# EAGLE board DAC_I2C_pan (EAGLE 7.1.0)
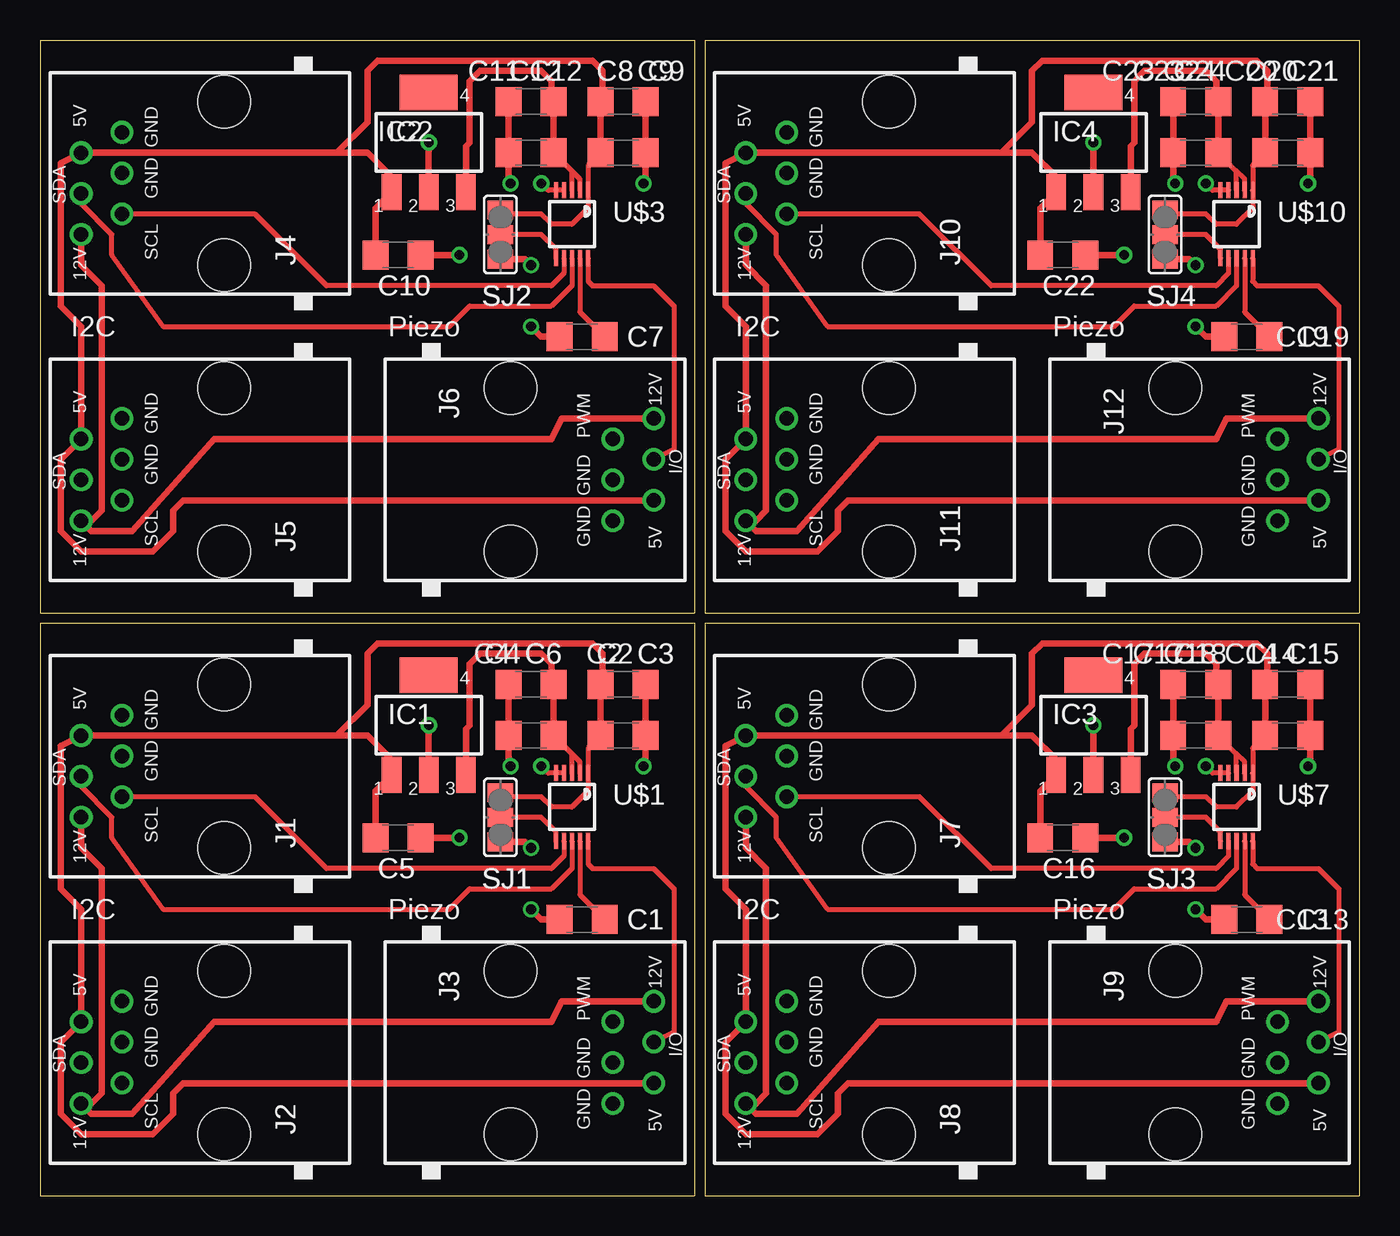
[diagram p0: board, top side]
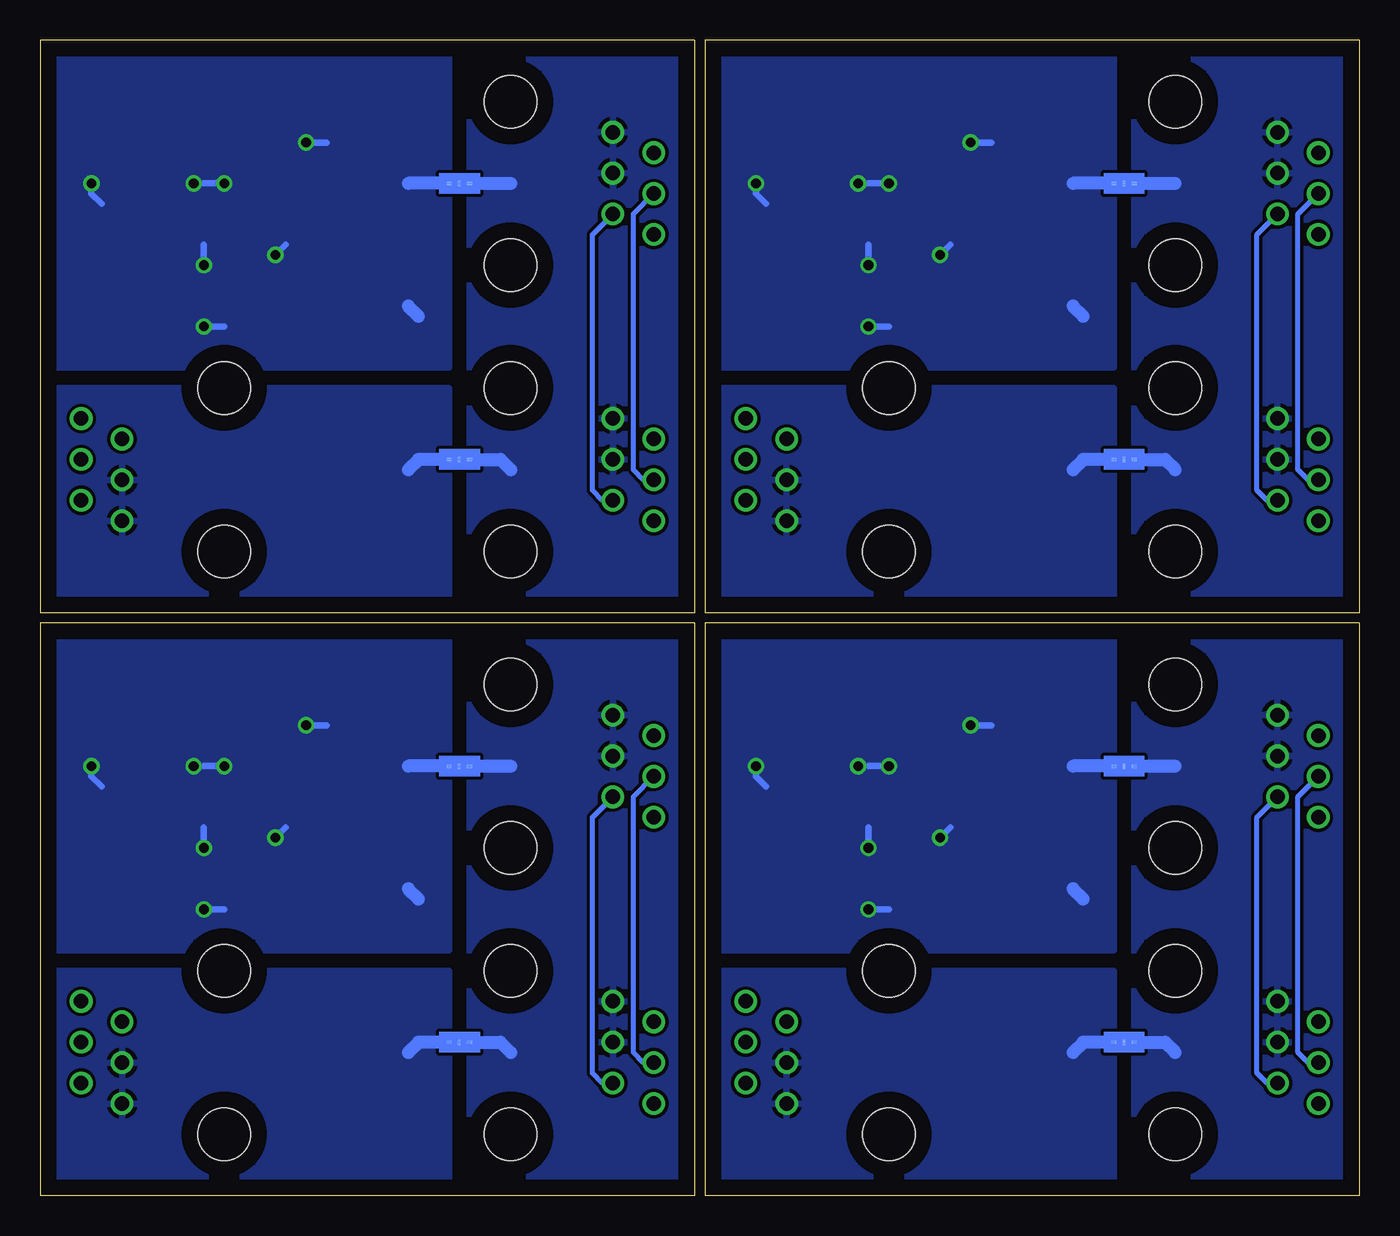
[diagram p1: board, bottom side, seen from below]

Size 81.92 x 71.75 mm. Coordinates in mm from the lower left corner, seen from the top.
Outline: 0,35.55 0,0 40.64,0 40.64,35.56 0,35.56
Outline: 0,71.75 0,36.2 40.64,36.2 40.64,71.75 0,71.75
Outline: 41.27,35.55 41.27,0 81.92,0 81.92,35.56 41.27,35.56
Outline: 41.27,71.75 41.27,36.2 81.92,36.2 81.92,71.75 41.27,71.75
Copper layers (1*16): Top 0.035mm / dielectric 1.5mm / Bottom 0.035mm
Design rules "default": minimum track width 10mil, minimum drill 24mil, track to track 8mil, track to pad 8mil, pad to pad 8mil, via to via 8mil, smd to smd 8mil, copper to edge 40mil, drill to drill 8mil, minimum pad ring 10mil, minimum via ring 8mil, stop-mask expansion 4mil, vias tented up to drill 0mil, thermal gap 10mil
Net classes: 0 default: width 0.305 mm, drill 0.254 mm; 1 power: width 0.305 mm, drill 0.254 mm; 2 GND: width 0.127 mm, clearance 0.762 mm

## Footprints (pad centres in the part's own frame; a part is rotated, then mirrored left to right if it is on the bottom)
C1206 = smd 1.6 x 1.8: 1 -1.4,0; 2 1.4,0
SOT223 = smd 1.219 x 2.235: 1 -2.311,-3.099; 2 0,-3.099; 3 2.311,-3.099 | smd 3.6 x 2.2: 4 0,3.099
RJ12-STRAIGHT-I2C = drill 0.9 pad 1.4: +5V 1.905,8.89; +12V -3.175,8.89; GND1 3.175,6.35; GND2 0.635,6.35; SCL -1.905,6.35; SDA -0.635,8.89 | hole 3.251: -5.08,0; 5.08,0
RJ12-STRAIGHT = drill 0.9 pad 1.4: +5V 1.905,8.89; +12V -3.175,8.89; GND1 3.175,6.35; GND2 0.635,6.35; I/O -0.635,8.89; PWM -1.905,6.35 | hole 3.251: -5.08,0; 5.08,0
SJ_2 = smd 1.168 x 1.6: 1 -1.524,0; 2 0,0; 3 1.524,0
MSOP10 = smd 0.25 x 1: 1 -1,-2.113; 2 -0.5,-2.113; 3 0,-2.113; 4 0.5,-2.113; 5 1,-2.113; 6 1,2.113; 7 0.5,2.113; 8 0,2.113; 9 -0.5,2.113; 10 -1,2.113
STAR = smd 0.152 x 0.305: AGND 0.635,-0.635; DGND 0.635,0.635 | smd 0.305 x 0.152: GND 0.635,0

## Placement (x,y rotation side)
C1  10n  [C1206]  33.66,17.14 180 top
C2  100n  [C1206]  36.2,28.57 0 top
C3  10u  [C1206]  36.2,31.75 0 top
C4  10uF  [C1206]  30.48,31.75 180 top
C5  10uF  [C1206]  22.23,22.23 0 top
C6  100n  [C1206]  30.48,28.57 180 top
C7  10n  [C1206]  33.66,53.34 180 top
C8  100n  [C1206]  36.2,64.77 0 top
C9  10u  [C1206]  36.2,67.94 0 top
C10  10uF  [C1206]  22.23,58.42 0 top
C11  10uF  [C1206]  30.48,67.94 180 top
C12  100n  [C1206]  30.48,64.77 180 top
C13  10n  [C1206]  74.93,17.14 180 top
C14  100n  [C1206]  77.47,28.57 0 top
C15  10u  [C1206]  77.47,31.75 0 top
C16  10uF  [C1206]  63.5,22.23 0 top
C17  10uF  [C1206]  71.75,31.75 180 top
C18  100n  [C1206]  71.75,28.57 180 top
C19  10n  [C1206]  74.93,53.34 180 top
C20  100n  [C1206]  77.47,64.77 0 top
C21  10u  [C1206]  77.47,67.94 0 top
C22  10uF  [C1206]  63.5,58.42 0 top
C23  10uF  [C1206]  71.75,67.94 180 top
C24  100n  [C1206]  71.75,64.77 180 top
IC1  MCP1703DB  [SOT223]  24.13,29.21 0 top
IC2  MCP1703DB  [SOT223]  24.13,65.41 0 top
IC3  MCP1703DB  [SOT223]  65.41,29.21 0 top
IC4  MCP1703DB  [SOT223]  65.41,65.41 0 top
J1  RJ12STRAIGHT-I2C  [RJ12-STRAIGHT-I2C]  11.43,26.67 90 top
J2  RJ12STRAIGHT-I2C  [RJ12-STRAIGHT-I2C]  11.43,8.89 90 top
J3  RJ12STRAIGHT  [RJ12-STRAIGHT]  29.21,8.89 270 top
J4  RJ12STRAIGHT-I2C  [RJ12-STRAIGHT-I2C]  11.43,62.87 90 top
J5  RJ12STRAIGHT-I2C  [RJ12-STRAIGHT-I2C]  11.43,45.09 90 top
J6  RJ12STRAIGHT  [RJ12-STRAIGHT]  29.21,45.09 270 top
J7  RJ12STRAIGHT-I2C  [RJ12-STRAIGHT-I2C]  52.7,26.67 90 top
J8  RJ12STRAIGHT-I2C  [RJ12-STRAIGHT-I2C]  52.7,8.89 90 top
J9  RJ12STRAIGHT  [RJ12-STRAIGHT]  70.48,8.89 270 top
J10  RJ12STRAIGHT-I2C  [RJ12-STRAIGHT-I2C]  52.7,62.87 90 top
J11  RJ12STRAIGHT-I2C  [RJ12-STRAIGHT-I2C]  52.7,45.09 90 top
J12  RJ12STRAIGHT  [RJ12-STRAIGHT]  70.48,45.09 270 top
SJ1  [SJ_2]  28.57,23.5 270 top
SJ2  [SJ_2]  28.57,59.69 270 top
SJ3  [SJ_2]  69.85,23.5 270 top
SJ4  [SJ_2]  69.85,59.69 270 top
U$1  AD5693R  [MSOP10]  33.02,24.13 180 top
U$2  STARGND  [STAR]  14.61,10.16 270 bottom
U$3  AD5693R  [MSOP10]  33.02,60.33 180 top
U$4  STARGND  [STAR]  14.61,63.5 270 bottom
U$5  STARGND  [STAR]  14.61,27.3 270 bottom
U$6  STARGND  [STAR]  14.61,46.35 270 bottom
U$7  AD5693R  [MSOP10]  74.3,24.13 180 top
U$8  STARGND  [STAR]  55.88,27.3 270 bottom
U$9  STARGND  [STAR]  55.88,10.16 270 bottom
U$10  AD5693R  [MSOP10]  74.3,60.33 180 top
U$11  STARGND  [STAR]  55.88,63.5 270 bottom
U$12  STARGND  [STAR]  55.88,46.35 270 bottom

## Library data of the parts
C1-C24 = rcl
IC1-IC4 = linear
J1-J12 U$1-U$12 = lpatiny
SJ1-SJ4 = jumper

## Nets
3.3V [power]: C4.1 C6.1 IC1.3 U$1.2 U$1.3
3.3V1 [power]: C11.1 C12.1 IC2.3 U$3.2 U$3.3
3.3V2 [power]: C17.1 C18.1 IC3.3 U$7.2 U$7.3
3.3V3 [power]: C23.1 C24.1 IC4.3 U$10.2 U$10.3
AGND: C1.2 C2.2 C3.2 C4.2 C5.2 C6.2 IC1.2 SJ1.3 U$1.4 U$1.5 U$5.AGND
AGND1: C7.2 C8.2 C9.2 C10.2 C11.2 C12.2 IC2.2 SJ2.3 U$3.4 U$3.5 U$4.AGND
AGND2: C13.2 C14.2 C15.2 C16.2 C17.2 C18.2 IC3.2 SJ3.3 U$7.4 U$7.5 U$8.AGND
AGND3: C19.2 C20.2 C21.2 C22.2 C23.2 C24.2 IC4.2 SJ4.3 U$10.4 U$10.5 U$11.AGND
DGND: J1.GND1 J1.GND2 J2.GND1 J2.GND2 U$2.DGND U$2.GND U$5.DGND U$5.GND
DGND1: J4.GND1 J4.GND2 J5.GND1 J5.GND2 U$4.DGND U$4.GND U$6.DGND U$6.GND
DGND2: J7.GND1 J7.GND2 J8.GND1 J8.GND2 U$8.DGND U$8.GND U$9.DGND U$9.GND
DGND3: J10.GND1 J10.GND2 J11.GND1 J11.GND2 U$11.DGND U$11.GND U$12.DGND U$12.GND
GND: J3.GND1 J3.GND2 U$2.AGND
GND1: J6.GND1 J6.GND2 U$6.AGND
GND2: J9.GND1 J9.GND2 U$9.AGND
GND3: J12.GND1 J12.GND2 U$12.AGND
N$1: SJ1.2 U$1.6
N$2: SJ2.2 U$3.6
N$3: SJ3.2 U$7.6
N$4: SJ4.2 U$10.6
SCL: J1.SCL J2.SCL U$1.7
SCL1: J4.SCL J5.SCL U$3.7
SCL2: J7.SCL J8.SCL U$7.7
SCL3: J10.SCL J11.SCL U$10.7
SDA: J1.SDA J2.SDA U$1.8
SDA1: J4.SDA J5.SDA U$3.8
SDA2: J7.SDA J8.SDA U$7.8
SDA3: J10.SDA J11.SDA U$10.8
VCC: C2.1 C3.1 C5.1 IC1.1 J1.+5V J2.+5V J3.+5V SJ1.1 U$1.1
VCC1: C8.1 C9.1 C10.1 IC2.1 J4.+5V J5.+5V J6.+5V SJ2.1 U$3.1
VCC2: C14.1 C15.1 C16.1 IC3.1 J7.+5V J8.+5V J9.+5V SJ3.1 U$7.1
VCC3: C20.1 C21.1 C22.1 IC4.1 J10.+5V J11.+5V J12.+5V SJ4.1 U$10.1
VDD: J1.+12V J2.+12V J3.+12V
VDD1: J4.+12V J5.+12V J6.+12V
VDD2: J7.+12V J8.+12V J9.+12V
VDD3: J10.+12V J11.+12V J12.+12V
VOUT: J3.I/O U$1.10
VOUT1: J6.I/O U$3.10
VOUT2: J9.I/O U$7.10
VOUT3: J12.I/O U$10.10
VREF: C1.1 U$1.9
VREF1: C7.1 U$3.9
VREF2: C13.1 U$7.9
VREF3: C19.1 U$10.9

## Tracks (layer width: path | path; a pad name or v marks a point on that pad's centre or on a via)
3.3V
  Top 0.305: U$1.3 33.02,27.43 | 33.02,27.43 C6.1 | U$1.2 33.52,26.93 33.02,27.43
  Top 0.406: IC1.3 26.44,28.98 26.67,29.21 26.67,33.02 27.3,33.66 31.11,33.66 31.75,33.02 31.75,31.88 C4.1 C6.1
3.3V1
  Top 0.305: U$3.3 33.02,63.63 | 33.02,63.63 C12.1 | U$3.2 33.52,63.13 33.02,63.63
  Top 0.406: IC2.3 26.44,65.18 26.67,65.41 26.67,69.22 27.3,69.85 31.11,69.85 31.75,69.22 31.75,68.08 C11.1 C12.1
3.3V2
  Top 0.305: U$7.3 74.3,27.43 | 74.3,27.43 C18.1 | U$7.2 74.8,26.93 74.3,27.43
  Top 0.406: IC3.3 67.72,28.98 67.94,29.21 67.94,33.02 68.58,33.66 72.39,33.66 73.03,33.02 73.03,31.88 C17.1 C18.1
3.3V3
  Top 0.305: U$10.3 74.3,63.63 | 74.3,63.63 C24.1 | U$10.2 74.8,63.13 74.3,63.63
  Top 0.406: IC4.3 67.72,65.18 67.94,65.41 67.94,69.22 68.58,69.85 72.39,69.85 73.03,69.22 73.03,68.08 C23.1 C24.1
AGND  (via drill 0.6)
  Top 0.305: U$1.4 U$1.5 31.54,26.24 v31.11,26.67
  Top 0.406: IC1.2 v24.13,29.21 | C4.2 C6.2 29.08,26.8 v29.21,26.67 | C5.2 v26.04,22.23 | SJ1.3 30.1,21.97 v30.48,21.59 | C1.2 31.11,17.14 v30.48,17.78 | C3.2 C2.2 37.59,26.8 v37.47,26.67
  Bottom 0.305: v31.11,26.67 30.48,26.67
  Bottom 0.406: v24.13,29.21 22.86,29.21 | v29.21,26.67 30.48,26.67 | v26.04,22.23 25.4,22.86 | v30.48,21.59 30.48,22.86 | v30.48,17.78 29.21,17.78 | v37.47,26.67 37.47,26.04 36.83,25.4
  Bottom 0.813: 17.14,18.41 17.78,19.05 | U$5.AGND 17.78,26.67
  pour Bottom: 40.64,35.56 15.24,35.56 15.24,15.24 40.64,15.24
AGND1  (via drill 0.6)
  Top 0.305: U$3.4 U$3.5 31.54,62.44 v31.11,62.87
  Top 0.406: IC2.2 v24.13,65.41 | C11.2 C12.2 29.08,62.99 v29.21,62.87 | C10.2 v26.04,58.42 | SJ2.3 30.1,58.17 v30.48,57.78 | C7.2 31.11,53.34 v30.48,53.98 | C9.2 C8.2 37.59,62.99 v37.47,62.87
  Bottom 0.305: v31.11,62.87 30.48,62.87
  Bottom 0.406: v24.13,65.41 22.86,65.41 | v29.21,62.87 30.48,62.87 | v26.04,58.42 25.4,59.05 | v30.48,57.78 30.48,59.05 | v30.48,53.98 29.21,53.98 | v37.47,62.87 37.47,62.23 36.83,61.59
  Bottom 0.813: 17.14,54.61 17.78,55.24 | U$4.AGND 17.78,62.87
  pour Bottom: 40.64,71.75 15.24,71.75 15.24,51.44 40.64,51.44
AGND2  (via drill 0.6)
  Top 0.305: U$7.4 U$7.5 72.82,26.24 v72.39,26.67
  Top 0.406: IC3.2 v65.41,29.21 | C17.2 C18.2 70.36,26.8 v70.48,26.67 | C16.2 v67.31,22.23 | SJ3.3 71.37,21.97 v71.75,21.59 | C13.2 72.39,17.14 v71.75,17.78 | C15.2 C14.2 78.87,26.8 v78.74,26.67
  Bottom 0.305: v72.39,26.67 71.75,26.67
  Bottom 0.406: v65.41,29.21 64.14,29.21 | v70.48,26.67 71.75,26.67 | v67.31,22.23 66.67,22.86 | v71.75,21.59 71.75,22.86 | v71.75,17.78 70.48,17.78 | v78.74,26.67 78.74,26.04 78.11,25.4
  Bottom 0.813: 58.42,18.41 59.05,19.05 | U$8.AGND 59.05,26.67
  pour Bottom: 81.92,35.56 56.52,35.56 56.52,15.24 81.92,15.24
AGND3  (via drill 0.6)
  Top 0.305: U$10.4 U$10.5 72.82,62.44 v72.39,62.87
  Top 0.406: IC4.2 v65.41,65.41 | C23.2 C24.2 70.36,62.99 v70.48,62.87 | C22.2 v67.31,58.42 | SJ4.3 71.37,58.17 v71.75,57.78 | C19.2 72.39,53.34 v71.75,53.98 | C21.2 C20.2 78.87,62.99 v78.74,62.87
  Bottom 0.305: v72.39,62.87 71.75,62.87
  Bottom 0.406: v65.41,65.41 64.14,65.41 | v70.48,62.87 71.75,62.87 | v67.31,58.42 66.67,59.05 | v71.75,57.78 71.75,59.05 | v71.75,53.98 70.48,53.98 | v78.74,62.87 78.74,62.23 78.11,61.59
  Bottom 0.813: 58.42,54.61 59.05,55.24 | U$11.AGND 59.05,62.87
  pour Bottom: 81.92,71.75 56.52,71.75 56.52,51.44 81.92,51.44
DGND
  Bottom 0.813: U$2.GND U$2.DGND 12.06,9.53 11.43,8.89 | U$5.GND U$5.DGND 11.43,26.67
  pour Bottom: 0,35.56 13.97,35.56 13.97,0 0,0
DGND1
  Bottom 0.813: U$6.GND U$6.DGND 12.06,45.72 11.43,45.09 | U$4.GND U$4.DGND 11.43,62.87
  pour Bottom: 0,71.75 13.97,71.75 13.97,36.2 0,36.2
DGND2
  Bottom 0.813: U$9.GND U$9.DGND 53.34,9.53 52.7,8.89 | U$8.GND U$8.DGND 52.7,26.67
  pour Bottom: 41.27,35.56 55.24,35.56 55.24,0 41.27,0
DGND3
  Bottom 0.813: U$12.GND U$12.DGND 53.34,45.72 52.7,45.09 | U$11.GND U$11.DGND 52.7,62.87
  pour Bottom: 41.27,71.75 55.24,71.75 55.24,36.2 41.27,36.2
GND
  Bottom 0.813: U$2.AGND 17.14,9.53 17.78,8.89
  pour Bottom: 15.24,13.97 40.64,13.97 40.64,0 15.24,0
GND1
  Bottom 0.813: U$6.AGND 17.14,45.72 17.78,45.09
  pour Bottom: 15.24,50.16 40.64,50.16 40.64,36.2 15.24,36.2
GND2
  Bottom 0.813: U$9.AGND 58.42,9.53 59.05,8.89
  pour Bottom: 56.52,13.97 81.92,13.97 81.92,0 56.52,0
GND3
  Bottom 0.813: U$12.AGND 58.42,45.72 59.05,45.09
  pour Bottom: 56.52,50.16 81.92,50.16 81.92,36.2 56.52,36.2
N$1
  Top 0.305: U$1.6 32.02,22.59 31.11,23.5 SJ1.2
N$2
  Top 0.305: U$3.6 32.02,58.78 31.11,59.69 SJ2.2
N$3
  Top 0.305: U$7.6 73.3,22.59 72.39,23.5 SJ3.2
N$4
  Top 0.305: U$10.6 73.3,58.78 72.39,59.69 SJ4.2
SCL
  Top 0.305: U$1.7 32.52,21.09 31.75,20.32 17.78,20.32 13.34,24.77 J1.SCL
  Bottom 0.305: J2.SCL 5.71,6.99 6.35,7.62 6.35,23.5 J1.SCL
SCL1
  Top 0.305: U$3.7 32.52,57.28 31.75,56.52 17.78,56.52 13.34,60.96 J4.SCL
  Bottom 0.305: J5.SCL 5.71,43.18 6.35,43.81 6.35,59.69 J4.SCL
SCL2
  Top 0.305: U$7.7 73.8,21.09 73.03,20.32 59.05,20.32 54.61,24.77 J7.SCL
  Bottom 0.305: J8.SCL 46.99,6.99 47.62,7.62 47.62,23.5 J7.SCL
SCL3
  Top 0.305: U$10.7 73.8,57.28 73.03,56.52 59.05,56.52 54.61,60.96 J10.SCL
  Bottom 0.305: J11.SCL 46.99,43.18 47.62,43.81 47.62,59.69 J10.SCL
SDA
  Top 0.305: U$1.8 33.02,20.32 31.75,19.05 26.67,19.05 25.4,17.78 7.62,17.78 4.45,22.23 4.45,23.5 2.54,25.4 J1.SDA
  Bottom 0.305: J2.SDA 3.17,8.26 3.81,8.89 3.81,24.77 J1.SDA
SDA1
  Top 0.305: U$3.8 33.02,56.52 31.75,55.24 26.67,55.24 25.4,53.98 7.62,53.98 4.45,58.42 4.45,59.69 2.54,61.59 J4.SDA
  Bottom 0.305: J5.SDA 3.17,44.45 3.81,45.09 3.81,60.96 J4.SDA
SDA2
  Top 0.305: U$7.8 74.3,20.32 73.03,19.05 67.94,19.05 66.67,17.78 48.9,17.78 45.72,22.23 45.72,23.5 43.81,25.4 J7.SDA
  Bottom 0.305: J8.SDA 44.45,8.26 45.09,8.89 45.09,24.77 J7.SDA
SDA3
  Top 0.305: U$10.8 74.3,56.52 73.03,55.24 67.94,55.24 66.67,53.98 48.9,53.98 45.72,58.42 45.72,59.69 43.81,61.59 J10.SDA
  Bottom 0.305: J11.SDA 44.45,44.45 45.09,45.09 45.09,60.96 J10.SDA
VCC
  Top 0.305: C2.1 34.02,27.8 U$1.1 34.02,25.13 33.02,24.13 31.75,24.13 31.11,24.77 28.83,24.77 SJ1.1
  Top 0.406: C2.1 C3.1 34.92,31.88 34.92,33.66 34.29,34.29 20.95,34.29 20.32,33.66 20.32,30.48 18.41,28.57 | C5.1 20.82,25.12 IC1.1 21.82,27.08 20.32,28.57 18.41,28.57 | J3.+5V 8.89,6.99 8.26,6.35 8.26,5.08 6.99,3.81 2.54,3.81 1.27,5.08 1.27,9.53 J2.+5V 2.54,17.78 1.27,19.05 1.27,27.94 J1.+5V 18.41,28.57
VCC1
  Top 0.305: C8.1 34.02,63.99 U$3.1 34.02,61.33 33.02,60.33 31.75,60.33 31.11,60.96 28.83,60.96 SJ2.1
  Top 0.406: C8.1 C9.1 34.92,68.08 34.92,69.85 34.29,70.48 20.95,70.48 20.32,69.85 20.32,66.67 18.41,64.77 | C10.1 20.82,61.31 IC2.1 21.82,63.27 20.32,64.77 18.41,64.77 | J6.+5V 8.89,43.18 8.26,42.55 8.26,41.27 6.99,40.01 2.54,40.01 1.27,41.27 1.27,45.72 J5.+5V 2.54,53.98 1.27,55.24 1.27,64.14 J4.+5V 18.41,64.77
VCC2
  Top 0.305: C14.1 75.3,27.8 U$7.1 75.3,25.13 74.3,24.13 73.03,24.13 72.39,24.77 70.1,24.77 SJ3.1
  Top 0.406: C14.1 C15.1 76.2,31.88 76.2,33.66 75.56,34.29 62.23,34.29 61.59,33.66 61.59,30.48 59.69,28.57 | C16.1 62.1,25.12 IC3.1 63.09,27.08 61.59,28.57 59.69,28.57 | J9.+5V 50.16,6.99 49.53,6.35 49.53,5.08 48.26,3.81 43.81,3.81 42.55,5.08 42.55,9.53 J8.+5V 43.81,17.78 42.55,19.05 42.55,27.94 J7.+5V 59.69,28.57
VCC3
  Top 0.305: C20.1 75.3,63.99 U$10.1 75.3,61.33 74.3,60.33 73.03,60.33 72.39,60.96 70.1,60.96 SJ4.1
  Top 0.406: C20.1 C21.1 76.2,68.08 76.2,69.85 75.56,70.48 62.23,70.48 61.59,69.85 61.59,66.67 59.69,64.77 | C22.1 62.1,61.31 IC4.1 63.09,63.27 61.59,64.77 59.69,64.77 | J12.+5V 50.16,43.18 49.53,42.55 49.53,41.27 48.26,40.01 43.81,40.01 42.55,41.27 42.55,45.72 J11.+5V 43.81,53.98 42.55,55.24 42.55,64.14 J10.+5V 59.69,64.77
VDD
  Top 0.406: J1.+12V 2.54,21.59 3.81,20.32 3.81,6.35 3.17,5.71 J2.+12V 3.17,5.08 5.71,5.08 10.79,10.79 31.75,10.79 32.38,12.06 J3.+12V
VDD1
  Top 0.406: J4.+12V 2.54,57.78 3.81,56.52 3.81,42.55 3.17,41.91 J5.+12V 3.17,41.27 5.71,41.27 10.79,46.99 31.75,46.99 32.38,48.26 J6.+12V
VDD2
  Top 0.406: J7.+12V 43.81,21.59 45.09,20.32 45.09,6.35 44.45,5.71 J8.+12V 44.45,5.08 46.99,5.08 52.07,10.79 73.03,10.79 73.66,12.06 J9.+12V
VDD3
  Top 0.406: J10.+12V 43.81,57.78 45.09,56.52 45.09,42.55 44.45,41.91 J11.+12V 44.45,41.27 46.99,41.27 52.07,46.99 73.03,46.99 73.66,48.26 J12.+12V
VOUT
  Top 0.305: U$1.10 34.02,20.59 34.29,20.32 38.1,20.32 39.37,19.05 39.37,10.16 J3.I/O
VOUT1
  Top 0.305: U$3.10 34.02,56.78 34.29,56.52 38.1,56.52 39.37,55.24 39.37,46.35 J6.I/O
VOUT2
  Top 0.305: U$7.10 75.3,20.59 75.56,20.32 79.38,20.32 80.64,19.05 80.64,10.16 J9.I/O
VOUT3
  Top 0.305: U$10.10 75.3,56.78 75.56,56.52 79.38,56.52 80.64,55.24 80.64,46.35 J12.I/O
VREF
  Top 0.305: U$1.9 33.52,18.68 C1.1
VREF1
  Top 0.305: U$3.9 33.52,54.88 C7.1
VREF2
  Top 0.305: U$7.9 74.8,18.68 C13.1
VREF3
  Top 0.305: U$10.9 74.8,54.88 C19.1

## Text on the board
tNames: I2C | Piezo | I2C | Piezo | I2C | Piezo | I2C | Piezo
_tNames: C11 | C12 | C8 | C9 | C23 | C24 | C20 | C21 | IC2 | IC4 | U$3 | U$10 | J4 | J10 | C10 | C22 | SJ2 | SJ4 | C7 | C19 | J6 | J12 | J5 | J11 | C4 | C6 | C2 | C3 | C17 | C18 | C14 | C15 | IC1 | IC3 | U$1 | U$7 | J1 | J7 | C5 | C16 | SJ1 | SJ3 | C1 | C13 | J3 | J9 | J2 | J8